# Altium PCB PCB.PcbDoc
Units mm, origin at the board's own origin, x right, y up, seen from the top; angles counter-clockwise.
Board outline 20.07 x 30.23 mm, 2 copper layers (Top Layer, Bottom Layer), stack 1.569 mm thick; 14 components, 9 nets, 40 pads, 15 vias.
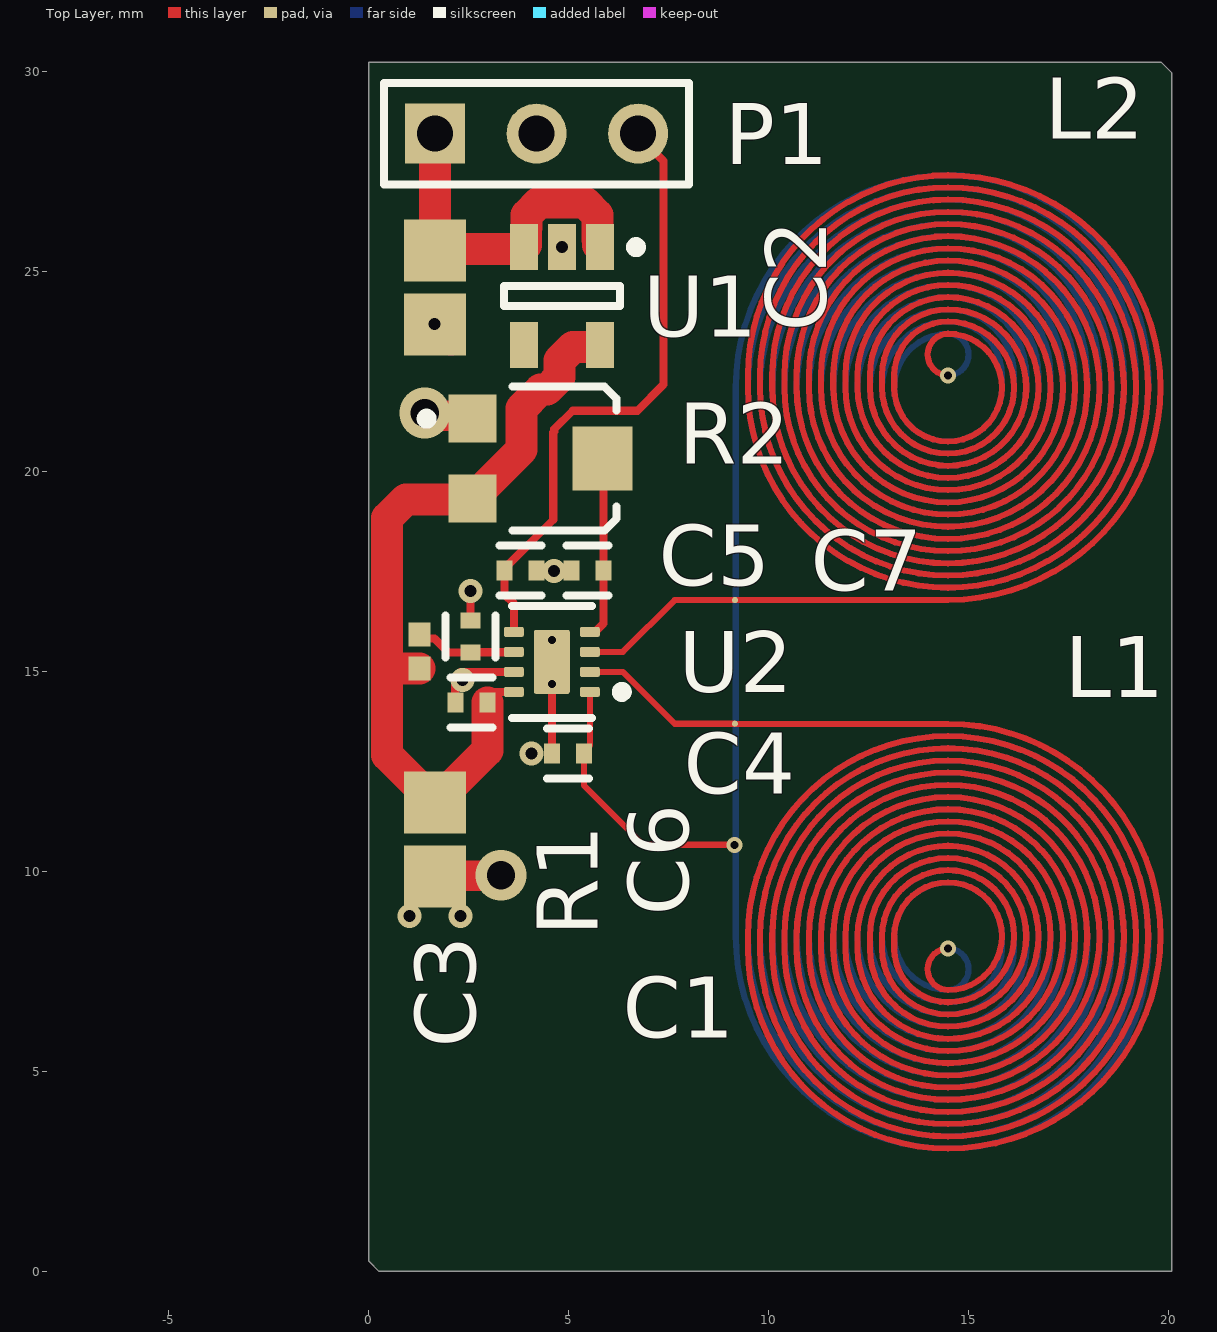
[diagram p0: Top Layer view]
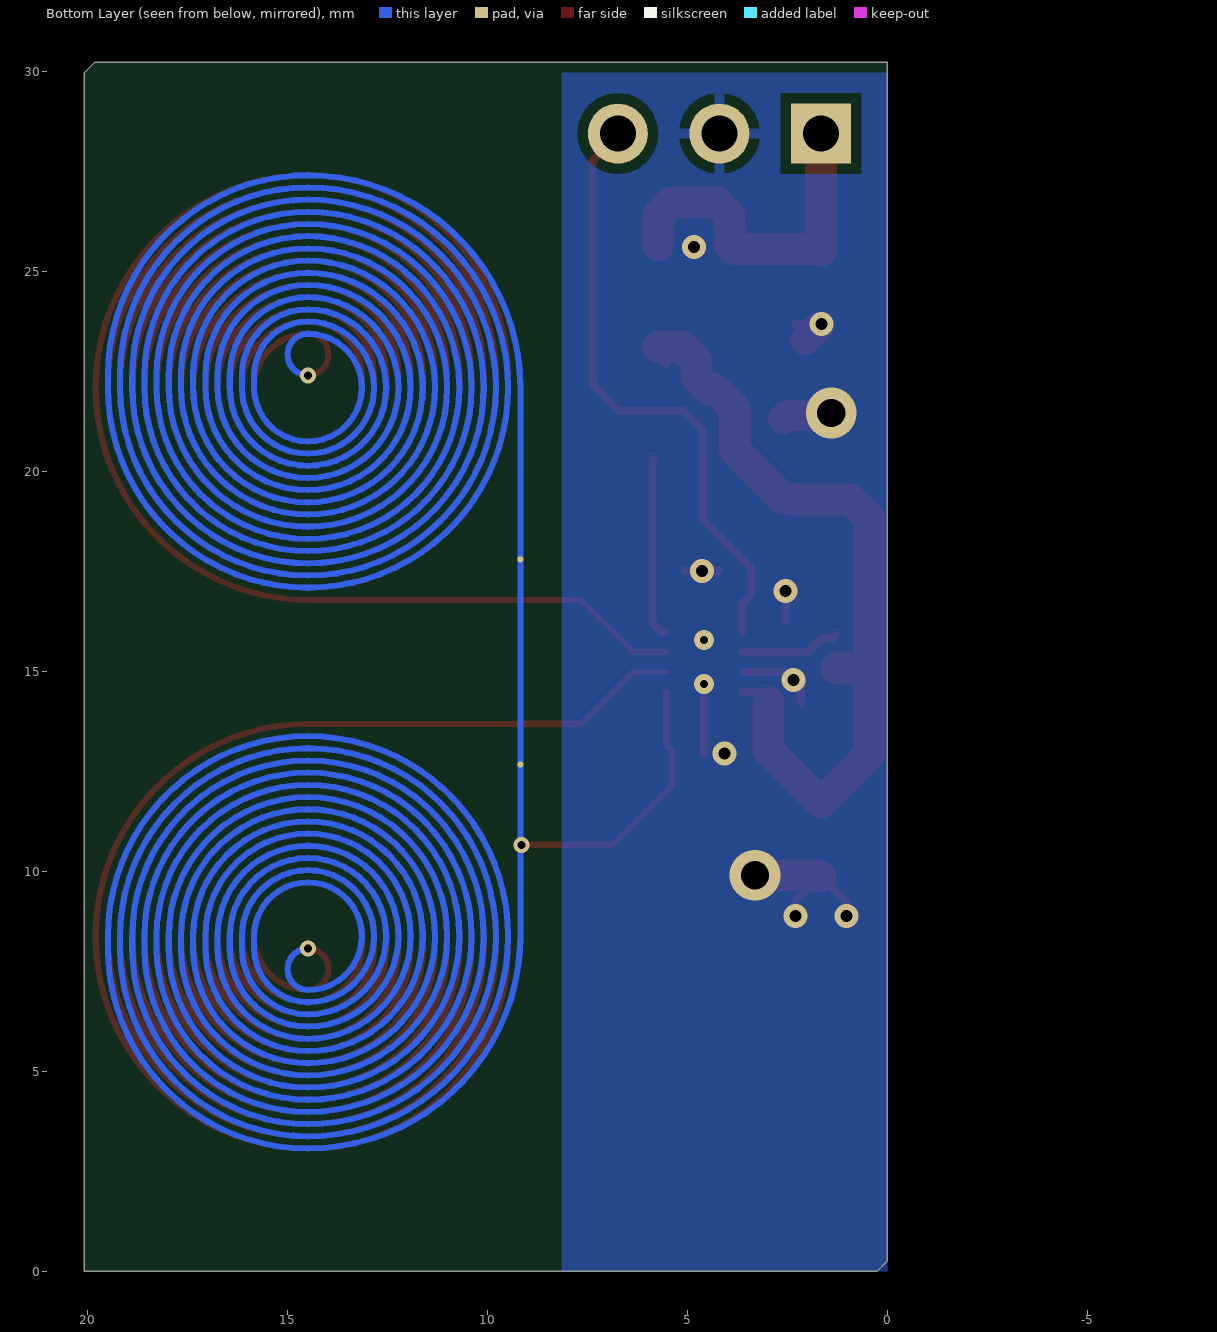
[diagram p1: Bottom Layer view, seen from below]
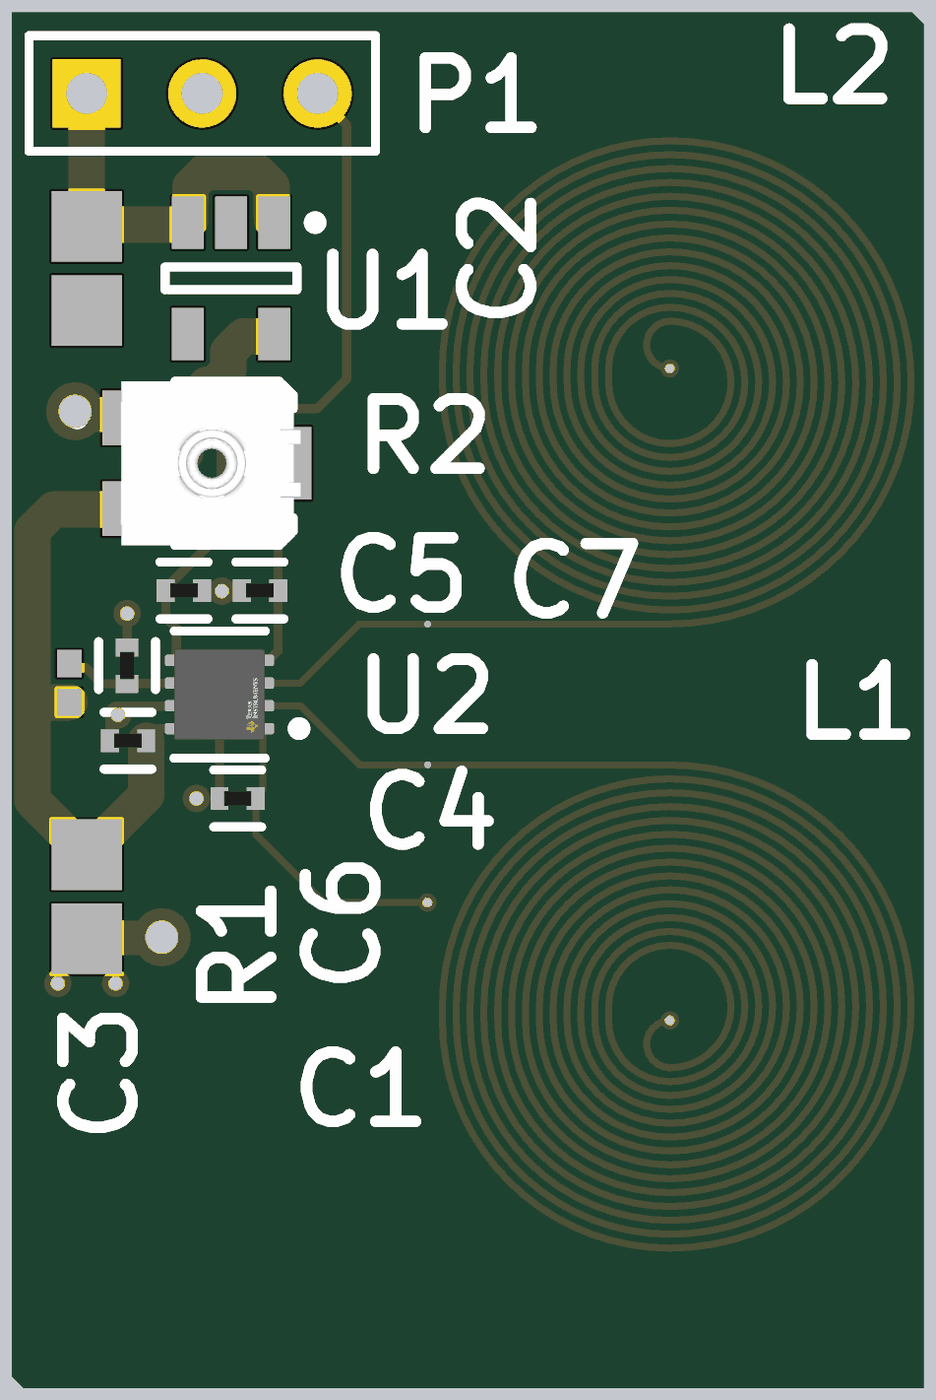
[diagram p2: 3D render of the assembled board from above, using the file's embedded part models]

## Layer stack, top to bottom
Top Solder: solder mask 0.0254, SM-001, Dk 4
Top Layer: signal copper 0.035
Dielectric 1: core 1.4986, Core-043, Dk 4.3
Bottom Layer: signal copper 0.035
Bottom Solder: solder mask 0.0254, SM-001, Dk 4

## Board outline
0,30.226 19.812,30.226 20.066,29.972 20.066,0 0.254,0 0,0.254

## Design rules (kind name [scope] priority, off if disabled: settings)
AssemblyTestPointUsage [All] p1: allowmultiple=TRUE
AssemblyTestpoint [All] p1: testpointundercomponent=TRUE minsize=0.635 maxsize=2.54 preferedsize=0.635 minholesize=0 maxholesize=1.016 preferedholesize=0.254 testpointgrid=0.025 usegrid=TRUE gridtolerance=0 allowsidetop=TRUE allowsidebottom=TRUE
Clearance [All] p1: gap=0.254 ignorepadtopadclearanceinfootprint=FALSE except(0: Arc-Hole Track-Hole SMDPad-Hole THPad-Hole Via-Hole Fill-Hole Poly-Hole Region-Hole Text-Hole; 0.14: Arc-SMDPad Arc-THPad Arc-Via Arc-Text Track-SMDPad Track-THPad Track-Via Track-Text SMDPad-SMDPad SMDPad-THPad SMDPad-Via SMDPad-Text THPad-THPad THPad-Via THPad-Text Via-Via Via-Text Fill-Text Poly-Text Region-Text Text-Text)
FabricationTestPointUsage [All] p1: valid=0 allowmultiple=TRUE
FabricationTestpoint [All] p1: side=3 testpointundercomponent=TRUE minsize=0.635 maxsize=2.54 preferedsize=0.635 minholesize=0.196 maxholesize=1.016 preferedholesize=0.254 testpointgrid=0.025 allowsidetop=TRUE allowsidebottom=TRUE usegrid=TRUE gridtolerance=0
HoleSize [All] p1: absolutevalues=TRUE maxlimit=15.24 minlimit=0.196 maxpercent=80.000 minpercent=20.000
MinimumSolderMaskSliver [All] p1: minsoldermaskwidth=0.102
NetAntennae NetAntennae_1 [All] p1 off: netantennaetolerance=0
NetAntennae [All] p2 off: netantennaetolerance=0
PlaneConnect PlaneConnect_via [IsVia] p1: planeconnectstyle=Direct reliefexpansion=0.508 reliefentries=4 reliefconductorwidth=0.254 reliefairgap=0.254
PlaneConnect [All] p2: planeconnectstyle=Relief reliefexpansion=0.508 reliefentries=4 reliefconductorwidth=0.254 reliefairgap=0.254
PolygonConnect PolygonConnect_via [IsVia] p1: connectstyle=Direct reliefconductorwidth=0.254 reliefentries=4 polygonreliefangle="90 Angle" airgapwidth=0.254
PolygonConnect [All] p2: connectstyle=Relief reliefconductorwidth=0.254 reliefentries=4 polygonreliefangle="90 Angle" airgapwidth=0.254
RoutingVias [All] p1: holewidth=0.711 width=1.27 viastyle="Through Hole" minholewidth=0.711 minwidth=1.27 maxholewidth=0.711 maxwidth=1.27
SilkToSilkClearance [All] p1: silktosilkclearance=0.025
SilkToSolderMaskClearance [IsPad] p1: minsilkscreentomaskgap=0 clearancetoexposedcopper=FALSE
SolderMaskExpansion SolderMaskExpansion_Via [IsVia] p1: expansion=0.051 istentingtop=TRUE
SolderMaskExpansion [All] p2: expansion=0.051 istentingtop=FALSE
UnRoutedNet [All] p1: checkbadconnections=TRUE
Width Width_power [InNet('No Net')] p1: maxlimit=1.27 minlimit=0.254 preferedwidth=0.8 minimp=50.000000 maximp=50.000000 favimp=50.000000
Width [All] p2: maxlimit=2.54 minlimit=0.152 preferedwidth=0.152 minimp=50.000000 maximp=50.000000 favimp=50.000000
19 further rules are at their usual default settings.

## Components (designator, comment, footprint, x,y, rotation, side; value= is the part's Value field where it differs from the comment)
C1 "100n" FP-GRM15-MFG 2.559,14.224 r180 top value=0.10μF
C2 "10uF" CAPC2013X94X50ML20T25 1.651,24.602 r90 top
C3 "10uF" CAPC2013X94X50ML20T25 1.651,10.795 r90 top
C4 "100n" FP-GRM15-MFG 4.972,12.954 r0 top value=0.10μF
C5 "100n" FP-GRM15-MFG 3.791,17.526 r0 top value=0.10μF
C6 "100n" FP-GRM15-MFG 2.54,15.875 r90 top value=0.10μF
C7 "100n" FP-GRM15-MFG 5.461,17.526 r0 top value=0.10μF
L1 "PLANAR_COIL" PLANAR_INDUCTOR#1 14.478,8.382 r0 top net-tie
L2 "PLANAR_COIL" PLANAR_INDUCTOR#2 14.478,22.098 r0 top net-tie
P1 "Header 3" HDR1X3 1.651,28.448 r0 top
R1 "1k" RESC1005X40X25NL05T10 1.27,15.494 r270 top
R2 "TC33X-2-103E" BOUR-TC33X-2_V 4.392,20.32 r0 top
U1 "ADP150AUJZ-3.3-R7" ADI-UJ-5_M 4.826,24.384 r270 top
U2 "LDC0851HDSGT" FP-DSG0008A-MFG 4.572,15.24 r180 top

## Footprints (in the part's own frame and the unit in brackets; to place one, negate y for a bottom-side part, rotate by r counter-clockwise, add the part's x,y. Pads: shape width x height; smd on the part's side, far side on the other; paste and mask are expansions set on the pad)
ADI-UJ-5_M [mm] "SOT23, 5-Leads, Body 2.9x1.6mm, Pitch 0.95mm, IPC Low Density"
  rect 1.15x0.7 smd: 1(-1.225,0.95) 2(-1.225,0) 3(-1.225,-0.95) 4(1.225,-0.95) 5(1.225,0.95)
  silkscreen extent -1.35,-1.45 0.25,1.98, body extent -0.8,-1.45 0.8,1.45, height 1
BOUR-TC33X-2_V [mm] "SMD, 3-Leads, Body 3.8x3.6mm"
  rect 1.2x1.2 smd: 1(-1.8,1) 3(-1.8,-1)
  rect 1.5x1.6 smd: 2(1.45,0)
  silkscreen extent -3.07,-1.8 1.8,1.8, body extent -2,-1.8 1.96,1.8, height 1.15
CAPC2013X94X50ML20T25 [mm] "Chip Capacitor, 2-Leads, Body 2.01x1.25mm, IPC Low Density"
  rect 1.55x1.55 smd: 1(-0.925,0) 2(0.925,0)
  body extent -1.1,-0.72 1.11,0.72, height 0.94
FP-DSG0008A-MFG [mm]
  rrect40% 0.5x0.25 smd paste+0 mask+0: 1(-0.95,0.75) 2(-0.95,0.25) 3(-0.95,-0.25) 4(-0.95,-0.75) 5(0.95,-0.75) 6(0.95,-0.25) 7(0.95,0.25) 8(0.95,0.75)
  rrect11% 0.9x1.6 smd paste-1000 mask+0: 9(0,0)
  silkscreen extent -1.88,-1.39 1,1.4, body extent -1.3,-1.15 1.3,1.15, height 0.25
FP-GRM15-MFG [mm]
  rect 0.4x0.5 smd paste+0 mask+0: 1(-0.4,0) 2(0.4,0)
  silkscreen extent -0.53,-0.63 0.53,0.63, body extent -0.7,-0.38 0.7,0.38, height 0.25
HDR1X3 [mm] "Connector; Header; 3 Position"
  rect 1.5x1.5 hole 0.9: 1(0,0)
  round 1.5 hole 0.9: 2(2.54,0) 3(5.08,0)
  silkscreen extent -1.27,-1.27 6.35,1.27
PLANAR_INDUCTOR#1 [mil]
  round 6 smd far side paste+0 mask+4: 1(-209,169)
  round 6 smd paste+0 mask+4: 2(-209.74,209.15)
  Top Layer lines w6: -210,209 0,209 cw(c0,0) 209,0 cw(c0,0) 0,-209 cw(c0,-12) -197,-12 -197,0 cw(c0,0) 0,197 cw(c0,0) 197,0 cw(c0,0) 0,-197 cw(c0,-12) -185,-12 -185,0 cw(c0,0) 0,185 cw(c0,0) 185,0 cw(c0,0) 0,-185 cw(c0,-12) -173,-12 -173,0 cw(c0,0) 0,173 cw(c0,0) 173,0 cw(c0,0) 0,-173 cw(c0,-12) -161,-12 -161,0 cw(c0,0) 0,161 cw(c0,0) 161,0 cw(c0,0) 0,-161 cw(c0,-12) -149,-12 -149,0 cw(c0,0) 0,149 cw(c0,0) 149,0 cw(c0,0) 0,-149 cw(c0,-12) -137,-12 -137,0 cw(c0,0) 0,137 cw(c0,0) 137,0 cw(c0,0) 0,-137 cw(c0,-12) -125,-12 -125,0 cw(c0,0) 0,125 cw(c0,0) 125,0 cw(c0,0) 0,-125 cw(c0,-12) -113,-12 -113,0 cw(c0,0) 0,113 cw(c0,0) 113,0 cw(c0,0) 0,-113 cw(c0,-12) -101,-12 -101,0 cw(c0,0) 0,101 cw(c0,0) 101,0 cw(c0,0) 0,-101 cw(c0,-12) -89,-12 -89,0 cw(c0,0) 0,89 cw(c0,0) 89,0 cw(c0,0) 0,-89 cw(c0,-12) -77,-12 -77,0 cw(c0,0) 0,77 cw(c0,0) 77,0 cw(c0,0) 0,-77 cw(c0,-12) -65,-12 -65,0 cw(c0,0) 0,65 cw(c0,0) 65,0 cw(c0,0) 0,-65 cw(c0,-12) -53,-12 -53,0 cw(c0,0) 0,53 cw(c0,0) 53,0 cw(c0,0) 0,-53 cw(c0.35,-32.5) 0,-12
  Bottom Layer lines w6: -209,169 -209,90 -209,0 ccw(c0,0) 0,-209 ccw(c0,-12) 197,-12 197,0 ccw(c0,0) 0,197 ccw(c0,0) -197,0 ccw(c0,0) 0,-197 ccw(c0,-12) 185,-12 185,0 ccw(c0,0) 0,185 ccw(c0,0) -185,0 ccw(c0,0) 0,-185 ccw(c0,-12) 173,-12 173,0 ccw(c0,0) 0,173 ccw(c0,0) -173,0 ccw(c0,0) 0,-173 ccw(c0,-12) 161,-12 161,0 ccw(c0,0) 0,161 ccw(c0,0) -161,0 ccw(c0,0) 0,-161 ccw(c0,-12) 149,-12 149,0 ccw(c0,0) 0,149 ccw(c0,0) -149,0 ccw(c0,0) 0,-149 ccw(c0,-12) 137,-12 137,0 ccw(c0,0) 0,137 ccw(c0,0) -137,0 ccw(c0,0) 0,-137 ccw(c0,-12) 125,-12 125,0 ccw(c0,0) 0,125 ccw(c0,0) -125,0 ccw(c0,0) 0,-125 ccw(c0,-12) 113,-12 113,0 ccw(c0,0) 0,113 ccw(c0,0) -113,0 ccw(c0,0) 0,-113 ccw(c0,-12) 101,-12 101,0 ccw(c0,0) 0,101 ccw(c0,0) -101,0 ccw(c0,0) 0,-101 ccw(c0,-12) 89,-12 89,0 ccw(c0,0) 0,89 ccw(c0,0) -89,0 ccw(c0,0) 0,-89 ccw(c0,-12) 77,-12 77,0 ccw(c0,0) 0,77 ccw(c0,0) -77,0 ccw(c0,0) 0,-77 ccw(c0,-12) 65,-12 65,0 ccw(c0,0) 0,65 ccw(c0,0) -65,0 ccw(c0,0) 0,-65 ccw(c0,-12) 53,-12 53,0 ccw(c0,0) 0,53 ccw(c0,0) -53,0 ccw(c0,0) 0,-53 ccw(c-0.35,-32.5) 0,-12
PLANAR_INDUCTOR#2 [mil]
  round 6 smd far side paste+0 mask+4: 1(-209,-169)
  round 6 smd paste+0 mask+4: 2(-209.74,-209.15)
  Top Layer lines w6: -210,-209 -209.74,-209 0,-209 ccw(c0,0) 209,0 ccw(c0,0) 0,209 ccw(c0,12) -197,12 -197,0 ccw(c0,0) 0,-197 ccw(c0,0) 197,0 ccw(c0,0) 0,197 ccw(c0,12) -185,12 -185,0 ccw(c0,0) 0,-185 ccw(c0,0) 185,0 ccw(c0,0) 0,185 ccw(c0,12) -173,12 -173,0 ccw(c0,0) 0,-173 ccw(c0,0) 173,0 ccw(c0,0) 0,173 ccw(c0,12) -161,12 -161,0 ccw(c0,0) 0,-161 ccw(c0,0) 161,0 ccw(c0,0) 0,161 ccw(c0,12) -149,12 -149,0 ccw(c0,0) 0,-149 ccw(c0,0) 149,0 ccw(c0,0) 0,149 ccw(c0,12) -137,12 -137,0 ccw(c0,0) 0,-137 ccw(c0,0) 137,0 ccw(c0,0) 0,137 ccw(c0,12) -125,12 -125,0 ccw(c0,0) 0,-125 ccw(c0,0) 125,0 ccw(c0,0) 0,125 ccw(c0,12) -113,12 -113,0 ccw(c0,0) 0,-113 ccw(c0,0) 113,0 ccw(c0,0) 0,113 ccw(c0,12) -101,12 -101,0 ccw(c0,0) 0,-101 ccw(c0,0) 101,0 ccw(c0,0) 0,101 ccw(c0,12) -89,12 -89,0 ccw(c0,0) 0,-89 ccw(c0,0) 89,0 ccw(c0,0) 0,89 ccw(c0,12) -77,12 -77,0 ccw(c0,0) 0,-77 ccw(c0,0) 77,0 ccw(c0,0) 0,77 ccw(c0,12) -65,12 -65,0 ccw(c0,0) 0,-65 ccw(c0,0) 65,0 ccw(c0,0) 0,65 ccw(c0,12) -53,12 -53,0 ccw(c0,0) 0,-53 ccw(c0,0) 53,0 ccw(c0,0) 0,53 ccw(c0.35,32.5) 0,12
  Bottom Layer lines w6: -209,-169 -209,0 cw(c0,0) 0,209 cw(c0,12) 197,12 197,0 cw(c0,0) 0,-197 cw(c0,0) -197,0 cw(c0,0) 0,197 cw(c0,12) 185,12 185,0 cw(c0,0) 0,-185 cw(c0,0) -185,0 cw(c0,0) 0,185 cw(c0,12) 173,12 173,0 cw(c0,0) 0,-173 cw(c0,0) -173,0 cw(c0,0) 0,173 cw(c0,12) 161,12 161,0 cw(c0,0) 0,-161 cw(c0,0) -161,0 cw(c0,0) 0,161 cw(c0,12) 149,12 149,0 cw(c0,0) 0,-149 cw(c0,0) -149,0 cw(c0,0) 0,149 cw(c0,12) 137,12 137,0 cw(c0,0) 0,-137 cw(c0,0) -137,0 cw(c0,0) 0,137 cw(c0,12) 125,12 125,0 cw(c0,0) 0,-125 cw(c0,0) -125,0 cw(c0,0) 0,125 cw(c0,12) 113,12 113,0 cw(c0,0) 0,-113 cw(c0,0) -113,0 cw(c0,0) 0,113 cw(c0,12) 101,12 101,0 cw(c0,0) 0,-101 cw(c0,0) -101,0 cw(c0,0) 0,101 cw(c0,12) 89,12 89,0 cw(c0,0) 0,-89 cw(c0,0) -89,0 cw(c0,0) 0,89 cw(c0,12) 77,12 77,0 cw(c0,0) 0,-77 cw(c0,0) -77,0 cw(c0,0) 0,77 cw(c0,12) 65,12 65,0 cw(c0,0) 0,-65 cw(c0,0) -65,0 cw(c0,0) 0,65 cw(c0,12) 53,12 53,0 cw(c0,0) 0,-53 cw(c0,0) -53,0 cw(c0,0) 0,53 cw(c-0.35,32.5) 0,12
RESC1005X40X25NL05T10 [mm] "Chip Resistor, 2-Leads, Body 1.00x0.50mm, IPC Medium Density"
  rect 0.6x0.55 smd: 1(-0.425,0) 2(0.425,0)
  body extent -0.53,-0.27 0.53,0.28, height 0.4

## Part data
C1 C4 C5 C6 C7: library part CMP-2100-03641-2, "CAP CER 0.1UF 16V X7R 0402", Capacitance=0.10μF, Manufacturer=Murata, Manufacturer Part Number=GRM155R71C104KA88D, Package=GRM15, Temperature="-55°C to +125°C", Temperature Characteristic=X7R, Temperature Range High=+125°C, Temperature Range Low=-55°C, Tolerance=10%, Voltage Rating=16Vdc, Category=Cap, ComponentLink2Description=Datasheet, ComponentLink2URL=https://search.murata.co.jp/Ceramy/image/img/A01X/G101/ENG/GRM155R71H471KA01-01A.pdf, Device Class L1="Passive Components", Device Class L2=Capacitors, Device Class L3="Ceramic Capacitors", Digikey Description="CAP CER 0.1UF 16V X7R 0402", Height=0.55mm, Ipc Land Pattern Name=CAPC10050X219, Lead Free=yes, Material=Ceramic, Mouser Description="0402 0.1 uF 16V ±10 % Tolerance X7R SMT Multilayer Ceramic Capacitor", Octopart=https://octopart.com/grm155r71c104ka88d-murata-196880, RoHS=TRUE, Standoff Height=0mm
C2 C3: library part CMP-1036-04427-2, Manufacturer="AVX Interconnect / Elco", Part Number=08051C104JAT2A
P1: "Header, 3-Pin", LatestRevisionDate=17-Jul-2002, LatestRevisionNote="Re-released for DXP Platform.", Publisher="Altium Limited"
R1: library part CMP-1011-00001-2, Manufacturer="Yageo / Phycomp", Part Number=RC0402JR-070RL
R2: library part CMP-2100-03695-1, "Trimming Potentiometer, 10000 Ohm, -40 to 100 degC, 3-Pin SMD, RoHS, Tape and Reel", Case/Package=SMD/SMT, Colour=Silver, Manufacturer=Bourns, Max Operating Temperature=100degC, Max Power Dissipation=100mW, Min Operating Temperature=-40degC, Package Description="3-Pin Surface Mount Device, Body 3.8 x 3.6 mm", Package Quantity=2500, Package Reference=TC33X-2, Resistance=10KOhm, Temperature Coefficient=250ppm/degreesC, Tolerance=25%, Voltage Rating (DC)=50V, Composition=Potentiometer, Contact Plating=Silver, Datasheet URL=http://www.bourns.com/docs/Product-Datasheets/TC33.pdf, Datasheet Version=42583.0, Depth=3.8mm, Height=0.047inch, Lead Free=LeadFree, Length=3mm, Manufacturer URL=http://www.bourns.com/, Military Standard=Not, Mount=SurfaceMount, Number of Turns=1, Packaging=TapeandReel, Power Rating=100mW, Radiation Hardening=No, REACH SVHC=NoSVHC, RoHSCompliant=true, Taper=Linear, Termination=FootPrint, Weight=29.4mg, Width=0.118inch
U1: library part CMP-0786-00394-1, "Ultralow Noise, 150 mA CMOS Linear Regulator, 2.2 to 5.5 V Vin, 3.3 V Vout, Industrial, 5-pin SOT23 (UJ-5), Reel", Manufacturer="Analog Devices", Preset Vout Values (V)=3.3, Supply Current IGND @ Small Load=10uA, Code_JEDEC=MO-193-AB, ComponentLink1Description="Manufacturer URL", ComponentLink1URL=http://www.analog.com/en/index.html, ComponentLink2Description=Datasheet, ComponentLink2URL=http://www.analog.com/static/imported-files/data_sheets/ADP150.pdf, ComponentLink3Description="Package Specification", ComponentLink3URL=http:/www.analog.com/static/imported-files/packages/PKG_PDF/TSOT(UJ)/UJ_5.pdf, ComponentLink4Description="URL Link1", ComponentLink4URL="Product URL:http://www.analog.com/en/ADP150/productSearch.html", DatasheetVersion="Rev. A", Iout max=150mA, Mounting Technology="Surface Mount", PackageDescription="5-Pin Thin Small Outline Transistor Package, Body 2.9 x 1.6 mm, Pitch 0.95 mm", PackageReference=UJ-5, PackageVersion="100708-A, 10/2008", Packing=Reel, PartNumber=ADP150AUJZ-3.3-R7, Vin (max) (V)=5.5, Vin (min) (V)=2.2
U2: library part CMP-04947-000001-1, "SENSOR PROX INDUCTIVE 8WFDFN", Max Operating Temperature=125°C, Max Supply Voltage=3.46V, Min Operating Temperature=-40°C, Min Supply Voltage=1.71V, Lead Free="Lead Free", Number of Inputs=1, Number of Pins=8, Packaging="Cut Tape", REACH SVHC="No SVHC", RoHS Compliant=Yes, Sensing Method=Inductive, Termination="PC Pin", Turn-On Delay Time=450us

## Via types
v1: diameter 0.6, hole 0.3, Top Layer to Bottom Layer, tented both sides, 8 vias
v2: diameter 0.4, hole 0.2, Top Layer to Bottom Layer, tented both sides, 3 vias
v3: diameter 1.27, hole 0.711, Top Layer to Bottom Layer, tented both sides, 2 vias
v4: diameter 0.5, hole 0.2, Top Layer to Bottom Layer, 2 vias

## Nets (pads, with @x,y where several pads share a name; then routed paths per layer and width w, separated by ;. In a path a pad name is that pad's centre, name@x,y a point inside that pad or via, vN(x,y) a via of type N, cw(c..) or ccw(c..) an arc to the next point about the centre after c; other vN are vias at no path point)
GND: C1.2 C2.1 C3.1 C4.1 C5.2 C6.2 C7.1 P1.2 R2.1 U1.2 U2.7 U2.9 | length 12.3
  Top Layer w0.203: v1(1.016,8.89) 1.016,9.235 C3.1 ; C3.1@1.669,9.888 2.286,9.271 v1(2.286,8.89) ; C2.1@1.706,23.622 v1(1.643,23.685) 2.298,23.685 C2.1@2.306,23.677 ; C1.2 2.159,14.859 2.286,14.986 3.618,14.986 U2.7 ; v1@2.215,14.915 v1(2.339,14.79) ; C6.2 v1(2.54,17.018) ; C5.2 4.199,17.518 4.618,17.518 v1(4.626,17.51) 4.634,17.518 5.053,17.518 C7.1 ; C4.1 v4(4.572,14.69)
  Top Layer w0.762: v3(1.397,21.463) 1.469,21.391 2.521,21.391 R2.1 ; C3.1 1.669,9.888 3.284,9.888 v3(3.302,9.906) ; C2.1@1.706,23.622 C2.1@2.045,23.283
  other v1: 4.064,12.954 4.826,25.609
  other v4: 4.572,15.79
NetC1_1: C1.1 C3.2 R1.2 R2.3 U1.5 U2.8 | length 20.8
  Top Layer w0.152: C1.1 2.959,14.274 3.175,14.49
  Top Layer w0.2: 3.175,14.49 U2.8
  Top Layer w0.203: U1.5@5.528,22.686 5.776,22.934 U1.5
  Top Layer w0.8: R1.2 0.538,15.069 0.455,14.986 ; C1.1 2.959,13.028 C3.2 0.455,12.916 0.455,14.986 ; U1.5@5.726,23.109 5.103,23.109 4.766,22.772 4.766,22.36 4.45,22.044 4.285,22.044 3.816,21.576 3.816,20.544 R2.3 2.408,19.32 2.392,19.304 0.924,19.304 0.455,18.835 0.455,14.986
NetC2_2: C2.2 P1.1 U1.1 U1.3 | length 8.8
  Top Layer w0.8: P1.1 C2.2 1.692,25.568 3.835,25.568 3.926,25.659 3.926,26.089 3.936,26.099 3.936,26.408 4.252,26.724 5.4,26.724 5.716,26.408 5.716,25.794 5.726,25.784 U1.1@5.726,25.659
NetC4_2: C4.2 L1.1 L2.1 U2.1 | length 11.9
  Top Layer w0.152: U2.1 5.522,13.154 5.372,13.004 C4.2 5.372,12.154 6.858,10.668 v2(9.144,10.668)
  Bottom Layer w0.152: L1.1 L2.1
  other v2: 14.478,8.077
NetC5_1: C5.1 P1.3 U2.5 | length 15.4
  Top Layer w0.203: U2.5 3.622,16.698 3.391,16.929 C5.1 3.391,17.576 4.609,18.794 4.609,20.978 4.634,21.003 4.634,21.058 5.096,21.52 6.712,21.52 7.366,22.173 7.366,27.76 6.731,28.395 P1.3
NetC6_1: C6.1 R1.1 U2.6 | length 2.5
  Top Layer w0.203: R1.1 1.364,15.825 1.636,15.825 1.985,15.475 C6.1 2.547,15.482 3.614,15.482 U2.6
NetC7_2: C7.2 R2.2 U2.4 | length 4.6
  Top Layer w0.203: U2.4 5.647,15.99 5.861,16.204 C7.2 5.861,20.301 R2.2
NetL1_2: L1.2 U2.2 | length 4.2
  Top Layer w0.152: U2.2 6.35,14.99 7.646,13.694 L1.2@9.144,13.694
NetL2_2: L2.2 U2.3 | length 4.2
  Top Layer w0.152: U2.3 6.35,15.49 7.646,16.786 L2.2
  other v2: 14.478,22.403
pads on no net: U1.4

## Polygon pours and split planes (outlines as drawn)
GND on Bottom Layer "GND_L02_P000" (solid, pour order 0): 0,29.972 20.066,29.972 20.066,0 0,0

## Other copper
Top Layer:
  pour cut-out: -7.112,6.223
Bottom Layer:
  pour cut-out: 8.128,30.226 8.128,0 20.066,0 20.066,30.226

## Silkscreen, mask and mechanical layers (free items; w line width, h text height)
Mechanical 1:
  lines w0.2: -0.1,0.254 ccw(c0,0.254) -0.071,0.183 ; -0.1,0.254 ccw(c0,0.254) -0.071,0.183 ; -0.1,0.254 -0.1,30.226 ; -0.1,30.226 cw(c0,30.226) 0,30.326 ; -0.1,30.226 cw(c0,30.226) 0,30.326 ; -0.071,0.183 0.183,-0.071 ; 0,30.326 19.812,30.326 ; 0.183,-0.071 ccw(c0.254,0) 0.254,-0.1 ; 0.183,-0.071 ccw(c0.254,0) 0.254,-0.1 ; 0.254,-0.1 20.066,-0.1 ; 19.812,30.326 cw(c19.812,30.226) 19.883,30.297 ; 19.812,30.326 cw(c19.812,30.226) 19.883,30.297 ; 19.883,30.297 20.137,30.043 ; 20.066,-0.1 ccw(c20.066,0) 20.166,0 ; 20.066,-0.1 ccw(c20.066,0) 20.166,0 ; 20.137,30.043 cw(c20.066,29.972) 20.166,29.972 ; 20.137,30.043 cw(c20.066,29.972) 20.166,29.972 ; 20.166,0 20.166,29.972